# Altium PCB AD9834PCB.PcbDoc
Units mil, origin at the board's own origin, x right, y up, seen from the top; angles counter-clockwise.
Board outline 3031 x 3269 mil, 2 copper layers (Top Layer, Bottom Layer); 78 components, 30 nets, 256 pads, 392 vias.
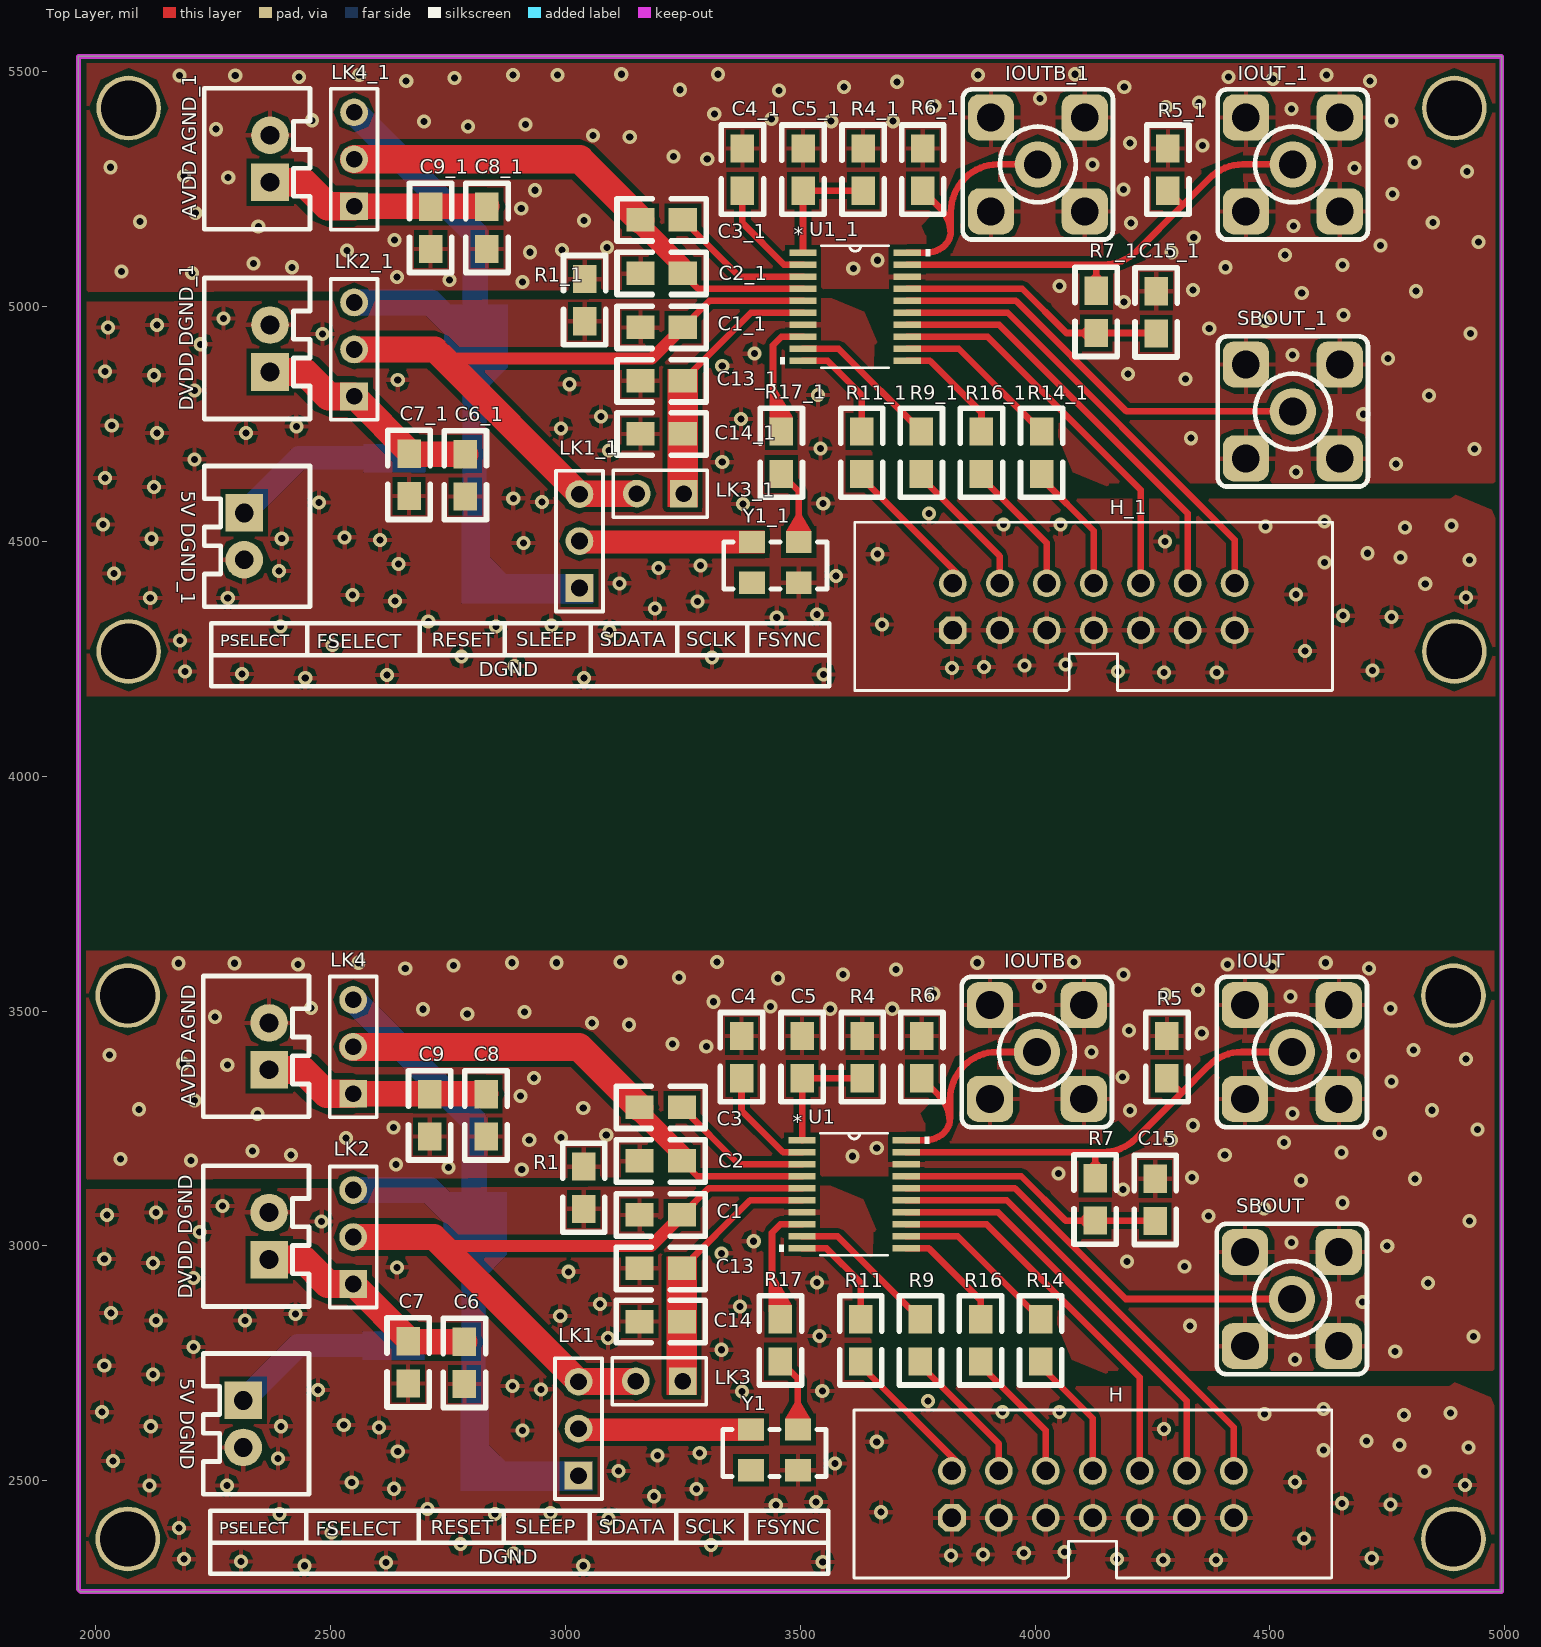
[diagram p0: Top Layer view]
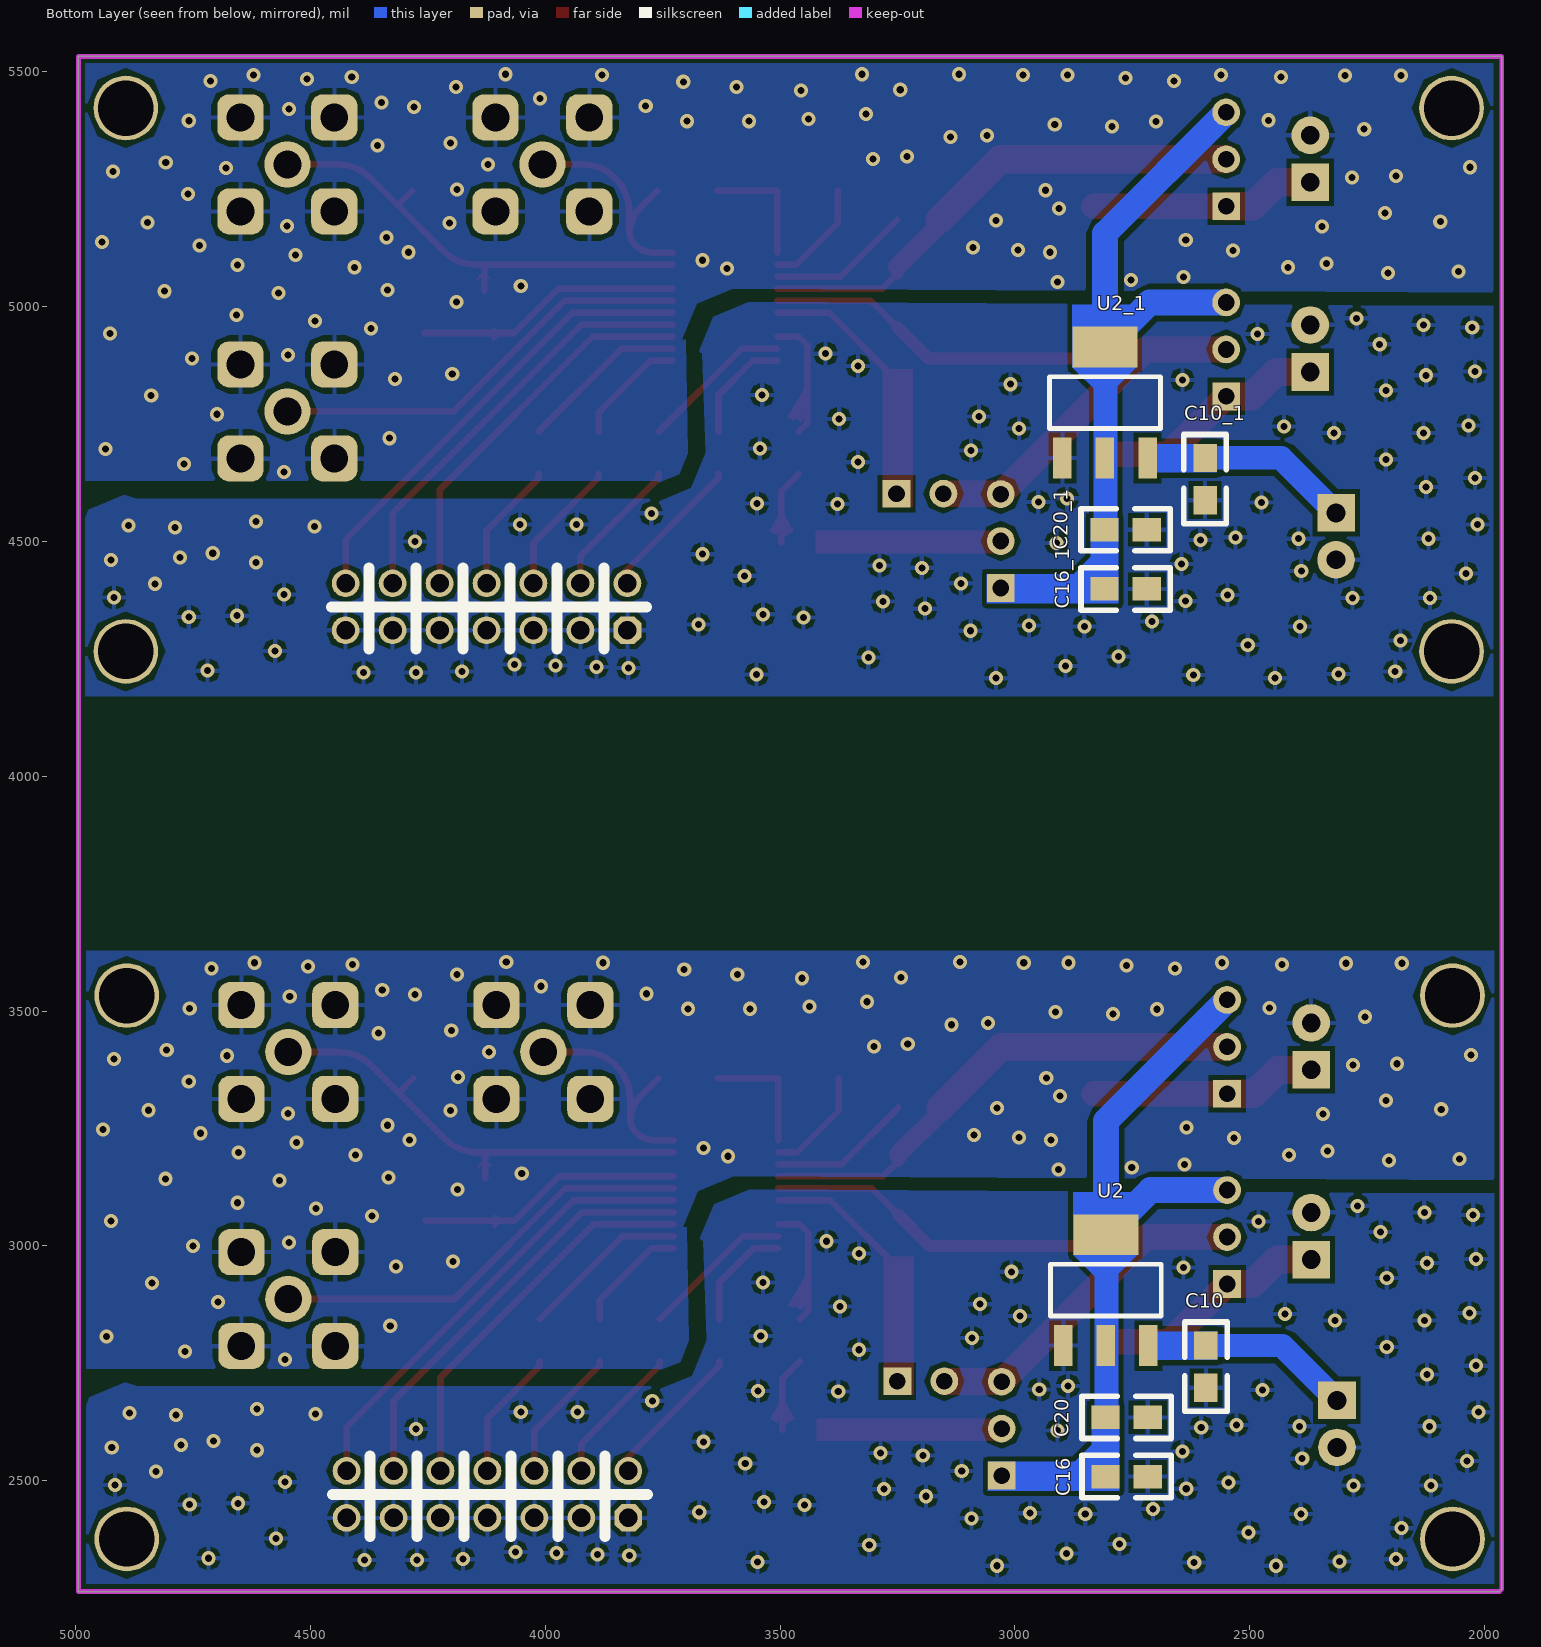
[diagram p1: Bottom Layer view, seen from below]

## Layer stack, top to bottom
Top Solder: solder mask 0.4, Solder Resist, Dk 3.5
Top Layer: signal copper 1.4
Dielectric 1: dielectric 12.6, FR-4, Dk 4.8
Bottom Layer: signal copper 1.4
Bottom Solder: solder mask 0.4, Solder Resist, Dk 3.5

## Board outline
1963,2269 1963,5533 4994,5533 4994,2264 1968,2264

## Design rules (kind name [scope] priority, off if disabled: settings)
Clearance [All] p1: gap=10
PolygonConnect [All] p1: connectstyle=Relief reliefconductorwidth=10 reliefentries=4 polygonreliefangle="90 Angle" airgapwidth=10
RoutingVias [All] p1: holewidth=28 width=50 viastyle="Through Hole" minholewidth=28 minwidth=50 maxholewidth=28 maxwidth=50
SolderMaskExpansion [All] p1: expansion=4
Width [All] p1: maxlimit=60 minlimit=6 preferedwidth=10
30 further rules are at their usual default settings.

## Classes and differential pairs
component class AD9834原理图: "5V DGND" "AVDD AGND" C1 C2 C3 C4 C5 C6 C7 C8 C9 C10 C13 C14 C15 C16 C20 "DVDD DGND" H IOUT IOUTB LK1 LK2 LK3 LK4 R1 R4 R5 R6 R7 R9 R11 R14 R16 R17 SBOUT U1 U2 Y1

## Components (designator, comment, footprint, x,y, rotation, side; value= is the part's Value field where it differs from the comment)
"5V DGND" "Power_2Port" Power_S_2Port 2314,2671 r270 top (schematic designator 5V)
"5V DGND_1" "Power_2Port" Power_S_2Port 2316,4561 r270 top (schematic designator 5V)
"AVDD AGND" "Power_2Port" Power_S_2Port 2369,3375 r90 top (schematic designator AVDD)
"AVDD AGND_1" "Power_2Port" Power_S_2Port 2371,5265 r90 top (schematic designator AVDD)
C1 "Cap1" 0805 3158,3066 r0 top
C1_1 "Cap1" 0805 3160,4956 r0 top (schematic designator C1)
C2 "Cap1" 0805 3158,3181 r0 top
C2_1 "Cap1" 0805 3160,5071 r0 top (schematic designator C2)
C3 "Cap1" 0805 3248,3295 r180 top
C3_1 "Cap1" 0805 3250,5185 r180 top (schematic designator C3)
C4 "Cap1" 0805 3375,3357 r90 top
C4_1 "Cap1" 0805 3377,5247 r90 top (schematic designator C4)
C5 "Cap1" 0805 3504,3447 r270 top
C5_1 "Cap1" 0805 3506,5337 r270 top (schematic designator C5)
C6 "Cap1" 0805 2785,2706 r90 top
C6_1 "Cap1" 0805 2787,4596 r90 top (schematic designator C6)
C7 "Cap1" 0805 2665,2707 r90 top
C7_1 "Cap1" 0805 2667,4597 r90 top (schematic designator C7)
C8 "Cap1" 0805 2831,3233 r90 top
C8_1 "Cap1" 0805 2833,5123 r90 top (schematic designator C8)
C9 "Cap1" 0805 2711,3233 r90 top
C9_1 "Cap1" 0805 2713,5123 r90 top (schematic designator C9)
C10 "Cap1" 0805 2593,2698 r90 bottom
C10_1 "Cap1" 0805 2595,4588 r90 bottom (schematic designator C10)
C13 "Cap1" 0805 3158,2952 r0 top
C13_1 "Cap1" 0805 3160,4842 r0 top (schematic designator C13)
C14 "Cap1" 0805 3158,2839 r0 top
C14_1 "Cap1" 0805 3160,4729 r0 top (schematic designator C14)
C15 "Cap1" 0805 4256,3143 r270 top
C15_1 "Cap1" 0805 4258,5033 r270 top (schematic designator C15)
C16 "Cap1" 0805 2717,2509 r0 bottom
C16_1 "Cap1" 0805 2719,4399 r0 bottom (schematic designator C16)
C20 "Cap1" 0805 2717,2635 r0 bottom
C20_1 "Cap1" 0805 2719,4525 r0 bottom (schematic designator C20)
"DVDD DGND" "Power_2Port" Power_S_2Port 2369,2971 r90 top (schematic designator DVDD)
"DVDD DGND_1" "Power_2Port" Power_S_2Port 2371,4861 r90 top (schematic designator DVDD)
H "Header 7X2" IDC-14 3823,2421 r0 top
H_1 "Header 7X2" IDC-14 3825,4311 r0 top (schematic designator H)
IOUT "SMA-2" SMA-KE 4547,3413 r90 top
IOUT_1 "SMA-2" SMA-KE 4549,5303 r90 top (schematic designator IOUT)
IOUTB "SMA-2" SMA-KE 4004,3413 r270 top
IOUTB_1 "SMA-2" SMA-KE 4006,5303 r270 top (schematic designator IOUTB)
LK1 "Header 3" HDR3X1_A 3028,2511 r90 top
LK1_1 "Header 3" HDR3X1_A 3030,4401 r90 top (schematic designator LK1)
LK2 "Header 3" HDR3X1_A 2548,2919 r90 top
LK2_1 "Header 3" HDR3X1_A 2550,4809 r90 top (schematic designator LK2)
LK3 "Header 2" HDR2X1_A 3250.06,2712 r180 top
LK3_1 "Header 2" HDR2X1_A 3252.06,4602 r180 top (schematic designator LK3)
LK4 "Header 3" HDR3X1_A 2548,3323.94 r90 top
LK4_1 "Header 3" HDR3X1_A 2550,5213.94 r90 top (schematic designator LK4)
R1 "RES" 0805 3039,3079 r90 top
R1_1 "RES" 0805 3041,4969 r90 top (schematic designator R1)
R4 "RES" 0805 3632,3447 r270 top
R4_1 "RES" 0805 3634,5337 r270 top (schematic designator R4)
R5 "RES" 0805 4281,3357 r90 top
R5_1 "RES" 0805 4283,5247 r90 top (schematic designator R5)
R6 "RES" 0805 3759,3447 r270 top
R6_1 "RES" 0805 3761,5337 r270 top (schematic designator R6)
R7 "RES" 0805 4128,3144 r270 top
R7_1 "RES" 0805 4130,5034 r270 top (schematic designator R7)
R9 "RES" 0805 3756,2754 r90 top
R9_1 "RES" 0805 3758,4644 r90 top (schematic designator R9)
R11 "RES" 0805 3629,2754 r90 top
R11_1 "RES" 0805 3631,4644 r90 top (schematic designator R11)
R14 "RES" 0805 4012,2754 r90 top
R14_1 "RES" 0805 4014,4644 r90 top (schematic designator R14)
R16 "RES" 0805 3884,2754 r90 top
R16_1 "RES" 0805 3886,4644 r90 top (schematic designator R16)
R17 "RES" 0805 3458,2754 r90 top
R17_1 "RES" 0805 3460,4644 r90 top (schematic designator R17)
SBOUT "SMA-2" SMA-KE 4547,2887 r0 top
SBOUT_1 "SMA-2" SMA-KE 4549,4777 r0 top (schematic designator SBOUT)
U1 "AD9834CRUZ" RU_20 3615,3110 r0 top
U1_1 "AD9834CRUZ" RU_20 3617,5000 r0 top (schematic designator U1)
U2 "AMS1117-3.3" SOT-223 2806,2906 r270 bottom
U2_1 "AMS1117-3.3" SOT-223 2808,4796 r270 bottom (schematic designator U2)
Y1 "75Mhz" SMDXTAL5032 3395,2609 r0 top
Y1_1 "75Mhz" SMDXTAL5032 3397,4499 r0 top (schematic designator Y1)

## Footprints (in the part's own frame and the unit in brackets; to place one, negate y for a bottom-side part, rotate by r counter-clockwise, add the part's x,y. Pads: shape width x height; smd on the part's side, far side on the other; paste and mask are expansions set on the pad)
0805 [mil]
  rect 60x50 smd: 1(0,0) 2(90,0)
  silkscreen extent -50,-45 140,45
HDR2X1_A [mm] "Connector; Header; 2 Position"
  rect 1.5x1.5 hole 0.9: 1(0,0)
  round 1.5 hole 0.9: 2(2.54,0)
  silkscreen extent -1.27,-1.27 3.81,1.27
HDR3X1_A [mm] "Connector; Header; 3 Position"
  rect 1.5x1.5 hole 0.9: 1(0,0)
  round 1.5 hole 0.9: 2(2.54,0) 3(5.08,0)
  silkscreen extent -1.27,-1.27 6.35,1.27
IDC-14 [mm]
  oct 1.5x1.5 hole 1: 1(0,0)
  round 1.5 hole 1: 2(0,2.54) 3(2.54,0) 4(2.54,2.54) 5(5.08,0) 6(5.08,2.54) 7(7.62,0) 8(7.62,2.54) 9(10.16,0) 10(10.16,2.54) 11(12.7,0) 12(12.7,2.54) 13(15.24,0) 14(15.24,2.54)
  silkscreen extent -5.3,-3.26 20.54,5.84, body extent -5.07,-2.98 20.31,5.87, height 9.13
Power_S_2Port [mil]
  rect 80x80 hole 40: 1(0,0)
  round 80 hole 40: 2(100,0)
  silkscreen extent -100,-85 200,140
RU_20 [mil]
  rect 58x14 smd mask+4: 1(-111,115.16) 2(-111,89.57) 3(-111,63.98) 4(-111,38.39) 5(-111,12.8) 6(-111,-12.8) 7(-111,-38.39) 8(-111,-63.98) 9(-111,-89.57) 10(-111,-115.16) 11(111,-115.16) 12(111,-89.57) 13(111,-63.98) 14(111,-38.39) 15(111,-12.8) 16(111,12.8) 17(111,38.39) 18(111,63.98) 19(111,89.57) 20(111,115.16)
  silkscreen extent -160,-130 160,130, body extent -126,-130 126,130, height 47
SMA-KE [mm]
  round 2.5 hole 1.5: 1(0,0)
  rrect50% 2.5x2.5 hole 1.5: 2(-2.54,2.54) 3(2.54,2.54) 4(-2.54,-2.54) 5(2.54,-2.54)
  silkscreen extent -4.06,-4.06 4.06,4.06, body extent -3.5,-3.5 3.5,3.5, height 9.53
SMDXTAL5032 [mm]
  rect 1.4x1.2 smd: 1(0,-2.2) 2(2.54,-2.2) 3(2.54,0) 4(0,0)
  silkscreen extent -1.52,-2.54 4.06,0
SOT-223 [mm]
  rect 2.2x1 smd: 1(3,-2.3) 2(3,0) 3(3,2.3)
  rect 2.2x3.5 smd: 4(-3,0)
  silkscreen extent -1.4,-3 1.4,3, body extent -3.49,-3.24 3.49,3.24, height 1.64

## Part data
H H_1: "Header, 7-Pin, Dual row"
LK1 LK1_1 LK2 LK2_1 LK3 LK3_1 LK4 LK4_1: "接插件"
U1 U1_1: "Imported"
U2 U2_1: library part AMS1117
Y1 Y1_1: library part XTAL4

## Free pads (board coordinates)
  round 137.8 hole 118.11: 0(4891,3533) 0(4893,5423) 1(4891,2376) 1(4893,4266) 2(2068,2376) 2(2070,4266) 3(2068,3533) 3(2070,5423)

## Via types
v1: diameter 30, hole 15, Top Layer to Bottom Layer, 392 vias

## Nets (pads, with @x,y where several pads share a name; then routed paths per layer and width w, separated by ;. In a path a pad name is that pad's centre, name@x,y a point inside that pad or via, vN(x,y) a via of type N, cw(c..) or ccw(c..) an arc to the next point about the centre after c; other vN are vias at no path point)
AGND: "AVDD AGND.2" C2.1 C4.2 C5.1 C8.1 C9.1 C15.1 IOUT.2 IOUT.3 IOUT.4 IOUT.5 IOUTB.2 IOUTB.3 IOUTB.4 IOUTB.5 R1.2 R4.1 R5.2 R6.1 SBOUT.2 SBOUT.3 SBOUT.4 SBOUT.5 U1.18
  other v1: 4554,2758 4767,2775 4934,2807 4330,2830 4697,2881 4837,2921 4318,2956 4196,2967 4750,3000 4546,3007 4925,3053 4369,3064 4488,3080 4655,3092 4187,3120 4566,3139 4809,3143 4334,3146 4050,3154 2907,3163 2751,3167 2639,3173 2203,3182 2053,3185 3611,3191 2416,3194 4404,3194 4653,3199 2334,3202 3663,3209 4530,3220 2923,3226 4289,3226 2533,3230 2991,3231 3087,3236 4734,3240 4942,3248 2634,3252 4336,3257 2344,3281 4548,3282 4202,3288 4845,3289 2092,3291 3038,3294 2210,3310 2904,3319 4759,3350 2933,3358 4186,3360 2280,3385 2186,3388 4918,3398 4678,3405 2029,3407 4120,3413 4806,3417 3300,3425 3228,3430 4355,3453 4200,3459 3135,3471 3057,3475 2254,3488 2791,3494 2913,3498 2697,3504 3564,3505 3696,3505 4757,3506 2458,3507 3437,3510 3315,3520 4544,3531 4277,3535 3784,3537 4347,3545 4009,3553 3453,3570 3242,3572 3591,3578 4188,3578 3704,3589 2659,3591 4711,3591 4505,3595 2762,3597 2431,3599 4410,3599 2176,3602 2295,3602 2559,3603 2886,3603 2981,3603 3877,3603 4619,3603 3117,3605 3323,3605 4083,3605
AVDD: C2.2 C3.2 LK4.2 U1.4 | length 1084.2
  Top Layer w14: C2.2 3280.61,3148.39 U1.4
  Top Layer w26: C3.2@3158,3285 C3.2 ; C2.2 C2.2@3248,3195
  Top Layer w40: C3.2@3158,3285 C2.2@3248,3195
  Top Layer w60: LK4.2 3029.06,3423.94 C3.2
AVDD-OUT: "AVDD AGND.1" C8.2 C9.2 LK4.1 | length 482.2
  Top Layer w55: LK4.1 C8.2@2830.06,3323.94
  Top Layer w60: 2369,3375 2440,3375 2491.06,3323.94 LK4.1
CAP/2.5V: C13.2 C14.2 LK3.1 U1.6 | length 557
  Top Layer w14: LK3.1 3248,2714.06 C14.2 C13.2 3393.2,3097.2 U1.6
DGND: "5V DGND.2" "DVDD DGND.2" C1.1 C6.1 C7.1 C10.1 C13.1 C14.1 C16.1 C20.1 H.1 H.3 H.5 H.7 H.9 H.11 H.13 R1.1 U1.7 U2.1 Y1.2
  other v1: 2444,2319 3038,2319 2618,2326 3548,2327 2309,2328 4273,2331 4385,2331 2188,2333 4175,2333 4717,2335 3821,2341 3889,2343 2890,2345 3976,2346 4063,2348 3310,2363 2777,2365 4573,2377 2502,2390 2177,2399 3092,2420 2391,2429 2850,2429 2968,2431 3672,2433 2706,2440 3448,2448 4757,2449 4654,2452 3534,2455 3189,2467 3279,2482 2635,2483 2114,2490 2279,2490 4916,2491 2545,2496 4554,2497 4829,2520 3113,2521 3574,2537 2037,2542 2388,2547 3196,2554 3286,2559 2643,2562 4614,2565 4923,2571 4776,2576 3663,2583 4706,2585 2909,2607 4275,2610 2603,2613 2117,2616 2394,2616 2528,2619 4786,2640 4489,2642 4885,2644 2013,2646 3931,2646 4052,2646 4614,2653 3772,2670 3376,2690 3547,2691 2473,2693 2948,2694 2887,2702 2122,2726 2018,2745 3332,2779 2208,2785 3091,2804 3541,2808 2128,2841 2318,2841 2989,2851 2425,2855 2032,2857 3372,2871 3074,2876 3536,2922 2208,2932 3007,2945 2641,2954 2122,2964 2018,2972 3332,2984 3401,3010 2221,3030 2481,3052 2024,3066 2128,3071 2270,3085
DVDD: C1.2 LK1.3 LK2.2 LK3.2 U1.5 | length 1423.4
  Top Layer w14: C1.2 3304.8,3122.8 U1.5
  Top Layer w26: 2739,3000 3182,3000 C1.2
  Top Layer w55: LK2.2 2720,3019 2739,3000 LK1.3
DVDD-OUT: "DVDD DGND.1" C6.2 C7.2 LK2.1 | length 488.5
  Top Layer w55: LK2.1 2671,2796 C6.2
  Top Layer w60: 2369,2971 2442,2971 2494,2919 LK2.1
FSELECT: R9.2 U1.9 | length 325.1
  Top Layer w14: U1.9 3579.57,3020.43 R9.2
FSYNC: H.14 U1.15 | length 990.1
  Top Layer w14: U1.15 3939.8,3097.2 4423,2614 H.14
IOUT: IOUT.1 R5.1 R7.1 U1.19 | length 1000.2
  Top Layer w14: U1.19 4128,3199.57 ; R7.1 4128,3199.57 ; R5.1 4312,3326 ; IOUT.1 4440.42,3413 ccw(c4440.42,3313) 4369.71,3383.71 4312,3326 ; 4128,3199.57 4144.15,3199.57 ccw(c4144.15,3299.57) 4214.86,3228.86 4312,3326
MCLK: R17.2 U1.8 | length 262.9
  Top Layer w14: R17.2 3440,2862 3440,3028 3458.02,3046.02 U1.8
Net5V_1: "5V DGND.1" C10.2 U2.3 | length 327.5
  Bottom Layer w50: 2314,2671 2431,2788 C10.2
NetC3_1: C3.1 U1.3 | length 306.1
  Top Layer w14: C3.1 3369.02,3173.98 U1.3
NetC4_1: C4.1 U1.2 | length 234.6
  Top Layer w14: C4.1 3375,3288 3463.43,3199.57 U1.2
NetC5_2: C5.2 R4.2 U1.1 | length 259.8
  Top Layer w14: U1.1 C5.2 R4.2
NetC15_2: C15.2 R7.2 U1.17 | length 568.1
  Top Layer w14: U1.17 3970.61,3148.39 4065,3054 R7.2 C15.2@4255,3054
NetH_2: H.2 R11.1 | length 325
  Top Layer w14: R11.1 3629,2745 3837,2537 3837,2535 H.2
NetH_4: H.4 R9.1 | length 302.2
  Top Layer w14: R9.1 3756,2746 3923,2579 H.4
NetH_6: H.6 R16.1 | length 290.6
  Top Layer w14: R16.1 3884,2746 4023,2607 H.6
NetH_8: H.8 R14.1 | length 279
  Top Layer w14: R14.1 4012,2744 4123,2633 H.8
NetIOUTB_1: IOUTB.1 R6.2 U1.20 | length 507.9
  Top Layer w14: U1.20 3767.05,3225.16 ccw(c3767.05,3280.95) 3806.5,3241.5 ccw(c3776.32,3271.68) 3818.38,3264.42 ccw(c3738.21,3264.42) 3794.9,3321.1 R6.2 ; 3819,3271.68 3819,3311.57 cw(c3921.43,3311.57) 3849,3384 cw(c3919.01,3313.99) 3919.01,3413 IOUTB.1
NetLK1_2: LK1.2 Y1.4
NetR17_1: R17.1 Y1.3 | length 160.3
  Top Layer w14: R17.1 3495,2717 Y1.3
NetSBOUT_1: SBOUT.1 U1.16 | length 918.7
  Top Layer w14: U1.16 3957.2,3122.8 4193,2887 SBOUT.1
PSELECT: R11.2 U1.10 | length 233.2
  Top Layer w14: U1.10 3556.16,2994.84 3629,2922 R11.2
RESET: R16.2 U1.11 | length 244.5
  Top Layer w14: U1.11 3774.16,2994.84 3884,2885 R16.2
SCLK: H.12 U1.14 | length 912.4
  Top Layer w14: U1.14 3921.39,3071.61 4323,2670 H.12
SDATA: H.10 U1.13 | length 831
  Top Layer w14: U1.13 3896.98,3046.02 4223,2720 H.10
SLEEP: R14.2 U1.12 | length 359.1
  Top Layer w14: U1.12 3835.57,3020.43 R14.2
VCC3.3V: C16.2 C20.2 LK1.1 LK2.3 LK4.3 U2.2 U2.4 | length 904
  Bottom Layer w55: LK2.3 2711.11,3119 U2.4 2806,3265.94 LK4.3
pads on no net: "5V DGND_1.1" "5V DGND_1.2" "AVDD AGND_1.1" "AVDD AGND_1.2" "DVDD DGND_1.1" "DVDD DGND_1.2" C1_1.1 C1_1.2 C2_1.1 C2_1.2 C3_1.1 C3_1.2 C4_1.1 C4_1.2 C5_1.1 C5_1.2 C6_1.1 C6_1.2 C7_1.1 C7_1.2 C8_1.1 C8_1.2 C9_1.1 C9_1.2 C10_1.1 C10_1.2 C13_1.1 C13_1.2 C14_1.1 C14_1.2 C15_1.1 C15_1.2 C16_1.1 C16_1.2 C20_1.1 C20_1.2 H_1.1 H_1.2 H_1.3 H_1.4 H_1.5 H_1.6 H_1.7 H_1.8 H_1.9 H_1.10 H_1.11 H_1.12 H_1.13 H_1.14 IOUT_1.1 IOUT_1.2 IOUT_1.3 IOUT_1.4 IOUT_1.5 IOUTB_1.1 IOUTB_1.2 IOUTB_1.3 IOUTB_1.4 IOUTB_1.5 LK1_1.1 LK1_1.2 LK1_1.3 LK2_1.1 LK2_1.2 LK2_1.3 LK3_1.1 LK3_1.2 LK4_1.1 LK4_1.2 LK4_1.3 R1_1.1 R1_1.2 R4_1.1 R4_1.2 R5_1.1 R5_1.2 R6_1.1 R6_1.2 R7_1.1 R7_1.2 R9_1.1 R9_1.2 R11_1.1 R11_1.2 R14_1.1 R14_1.2 R16_1.1 R16_1.2 R17_1.1 R17_1.2 SBOUT_1.1 SBOUT_1.2 SBOUT_1.3 SBOUT_1.4 SBOUT_1.5 U1_1.1 U1_1.2 U1_1.3 U1_1.4 U1_1.5 U1_1.6 U1_1.7 U1_1.8 U1_1.9 U1_1.10 U1_1.11 U1_1.12 U1_1.13 U1_1.14 U1_1.15 U1_1.16 U1_1.17 U1_1.18 U1_1.19 U1_1.20 U2_1.1 U2_1.2 U2_1.3 U2_1.4 Y1.1 Y1_1.1 Y1_1.2 Y1_1.3 Y1_1.4
copper on no net: | length 14577.6
  Top Layer w14: 3250,4956 3306.8,5012.8 3506,5012.8 ; 3250,5071 3282.61,5038.39 3506,5038.39 ; 3250,5185 3371.02,5063.98 3506,5063.98 ; 3252.06,4602 3250,4604.06 3250,4729 3250,4842 3395.2,4987.2 3506,4987.2 ; 3377,5247 3377,5178 3465.43,5089.57 3506,5089.57 ; 3460,4644 3497,4607 3497,4499 ; 3460,4734 3442,4752 3442,4918 3460.02,4936.02 3506,4936.02 ; 3506,4884.84 3558.16,4884.84 3631,4812 3631,4734 ; 3506,4910.43 3581.57,4910.43 3758,4734 ; 3506,5115.16 3506,5247 3634,5247 ; 3631,4644 3631,4635 3839,4427 3839,4425 3825,4411 ; 3728,4884.84 3776.16,4884.84 3886,4775 3886,4734 ; 3728,4910.43 3837.57,4910.43 4014,4734 ; 3728,4936.02 3898.98,4936.02 4225,4610 4225,4411 ; 3728,4961.61 3923.39,4961.61 4325,4560 4325,4411 ; 3728,4987.2 3941.8,4987.2 4425,4504 4425,4411 ; 3728,5012.8 3959.2,5012.8 4195,4777 4549,4777 ; 3728,5038.39 3972.61,5038.39 4067,4944 4130,4944 4257,4944 ; 3728,5089.57 4130,5089.57 ; 3728,5115.16 3769.05,5115.16 ccw(c3769.05,5170.95) 3808.5,5131.5 ccw(c3778.32,5161.68) 3820.38,5154.42 ccw(c3740.21,5154.42) 3796.9,5211.1 3761,5247 ; 3758,4644 3758,4636 3925,4469 3925,4411 ; 3821,5161.68 3821,5201.57 cw(c3923.43,5201.57) 3851,5274 cw(c3921.01,5203.99) 3921.01,5303 4006,5303 ; 3886,4644 3886,4636 4025,4497 4025,4411 ; 4014,4644 4014,4634 4125,4523 4125,4411 ; 4130,5034 4130,5089.57 ; 4283,5247 4314,5216 ; 4549,5303 4442.42,5303 ccw(c4442.42,5203) 4371.71,5273.71 4314,5216 ; 4130,5089.57 4146.15,5089.57 ccw(c4146.15,5189.57) 4216.86,5118.86 4314,5216
  Top Layer w26: 2741,4890 3184,4890 3250,4956 ; 3160,5175 3160,5185 ; 3250,5071 3250,5085
  Top Layer w40: 3160,5175 3250,5085
  Top Layer w55: 2550,4809 2673,4686 2787,4686 ; 2550,4909 2722,4909 2741,4890 3030,4601 ; 2550,5213.94 2832.06,5213.94
  Top Layer w60: 2371,4861 2444,4861 2496,4809 2550,4809 ; 2371,5265 2442,5265 2493.06,5213.94 2550,5213.94 ; 2550,5313.94 3031.06,5313.94 3160,5185
  Bottom Layer w50: 2316,4561 2433,4678 2595,4678
  Bottom Layer w55: 2550,5009 2713.11,5009 2808,4914.11 2808,5155.94 2550,5413.94
  other v1: 2446,4209 3040,4209 2620,4216 3550,4217 2311,4218 4275,4221 4387,4221 2190,4223 4177,4223 4719,4225 3823,4231 3891,4233 2892,4235 3978,4236 4065,4238 3312,4253 2779,4255 4575,4267 2504,4280 2179,4289 3094,4310 2393,4319 2852,4319 2970,4321 3674,4323 2708,4330 3450,4338 4759,4339 4656,4342 3536,4345 3191,4357 3281,4372 2637,4373 2116,4380 2281,4380 4918,4381 2547,4386 4556,4387 4831,4410 3115,4411 3576,4427 2039,4432 2390,4437 3198,4444 3288,4449 2645,4452 4616,4455 4925,4461 4778,4466 3665,4473 4708,4475 2911,4497 4277,4500 2605,4503 2119,4506 2396,4506 2530,4509 4788,4530 4491,4532 4887,4534 2015,4536 3933,4536 4054,4536 4616,4543 3774,4560 3378,4580 3549,4581 2475,4583 2950,4584 2889,4592 2124,4616 2020,4635 4556,4648 4769,4665 3334,4669 2210,4675 3093,4694 4936,4697 3543,4698 4332,4720 2130,4731 2320,4731 2991,4741 2427,4745 2034,4747 3374,4761 3076,4766 4699,4771 4839,4811 3538,4812 2210,4822 3009,4835 2643,4844 4320,4846 2124,4854 4198,4857 2020,4862 3334,4874 4752,4890 4548,4897 3403,4900 2223,4920 2483,4942 4927,4943 4371,4954 2026,4956 2130,4961 4490,4970 2272,4975 4657,4982 4189,5010 4568,5029 4811,5033 4336,5036 4052,5044 2909,5053 2753,5057 2641,5063 2205,5072 2055,5075 3613,5081 2418,5084 4406,5084 4655,5089 2336,5092 3665,5099 4532,5110 2925,5116 4291,5116 2535,5120 2993,5121 3089,5126 4736,5130 4944,5138 2636,5142 4338,5147 2346,5171 4550,5172 4204,5178 4847,5179 2094,5181 3040,5184 2212,5200 2906,5209 4761,5240 2935,5248 4188,5250 2282,5275 2188,5278 4920,5288 4680,5295 2031,5297 4122,5303 4808,5307 3302,5315 3230,5320 4357,5343 4202,5349 3137,5361 3059,5365 2256,5378 2793,5384 2915,5388 2699,5394 3566,5395 3698,5395 4759,5396 2460,5397 3439,5400 3317,5410 4546,5421 4279,5425 3786,5427 4349,5435 4011,5443 3455,5460 3244,5462 3593,5468 4190,5468 3706,5479 2661,5481 4713,5481 4507,5485 2764,5487 2433,5489 4412,5489 2178,5492 2297,5492 2561,5493 2888,5493 2983,5493 3879,5493 4621,5493 3119,5495 3325,5495 4085,5495

## Polygon pours and split planes (outlines as drawn)
no net on Bottom Layer "Top Layer-No Net" (solid, pour order 32): 1965,5030 3601,5030 cw(c3601,4930) 3701,4930 3701,4688 ccw(c3760,4688) 3760,4629 4996,4629 4996,5535 cw(c4993.5,5535) 4993.5,5532.5 1967.5,5532.5
no net on Bottom Layer "Top Layer-No Net" (solid, pour order 30): 1965,5002 3566,5002 cw(c3566,4902) 3666,4902 3666,4689 ccw(c3764,4689) 3764,4591 4870,4591 4896,4591 cw(c4896,4491) 4996,4491 4996,4154 ccw(c4993.5,4154) 4993.5,4156.5 1967.5,4156.5 cw(c1967.5,4159) 1965,4159
DGND on Bottom Layer "Top Layer-No Net" (solid, pour order 14): 1963,3112 3564,3112 cw(c3564,3012) 3664,3012 3664,2799 ccw(c3762,2799) 3762,2701 4868,2701 4894,2701 cw(c4894,2601) 4994,2601 4994,2264 ccw(c4991.5,2264) 4991.5,2266.5 1965.5,2266.5 cw(c1965.5,2269) 1963,2269
AGND on Bottom Layer "Top Layer-No Net" (solid, pour order 20): 1963,3140 3599,3140 cw(c3599,3040) 3699,3040 3699,2798 ccw(c3758,2798) 3758,2739 4994,2739 4994,3645 cw(c4991.5,3645) 4991.5,3642.5 1965.5,3642.5
no net on Top Layer "Top Layer-No Net" (solid, pour order 36): 1962,5031 3957,5031 cw(c3957,4931) 4057,4931 4057,4895 4057,4724 ccw(c4157,4724) 4157,4624 4995,4624 ccw(c4995,4625) 4996,4625 4996,5535 cw(c4993.5,5535) 4993.5,5532.5 1967.5,5532.5
no net on Top Layer "Top Layer-No Net" (solid, pour order 34): 1965,5001 cw(c1975,5001) 1975,5011 3567,5011 cw(c3567,4920) 3658,4920 3658,4654 ccw(c3721,4654) 3721,4591 4884,4591 4896,4591 cw(c4896,4491) 4996,4491 4996,4154 ccw(c4993.5,4154) 4993.5,4156.5 1967.5,4156.5
DGND on Top Layer "Top Layer-No Net" (solid, pour order 16): 1963,3111 cw(c1973,3111) 1973,3121 3565,3121 cw(c3565,3030) 3656,3030 3656,2764 ccw(c3719,2764) 3719,2701 4882,2701 4894,2701 cw(c4894,2601) 4994,2601 4994,2264 ccw(c4991.5,2264) 4991.5,2266.5 1965.5,2266.5
AGND on Top Layer "Top Layer-No Net" (solid, pour order 18): 1960,3141 3955,3141 cw(c3955,3041) 4055,3041 4055,3005 4055,2834 ccw(c4155,2834) 4155,2734 4993,2734 ccw(c4993,2735) 4994,2735 4994,3645 cw(c4991.5,3645) 4991.5,3642.5 1965.5,3642.5

## Keep-outs
Keep-Out Layer:
  the board outline again, w10

## Other copper
Top Layer:
  rectangle: 3217,4573 3282,4867
  region: 4117.5,5056.5 4130,5069 4126.5,5072.5 4114,5060
  region: 4144,5055 4148,5059 4134,5073 4130,5069
  region: 4130.5,5073.5 4145.78,5088.78 4142.78,5091.78 4127.5,5076.5
  region: 4127.5,5076.5 4133,5082 4119.5,5095.5 4114,5090
  region: 4110,4926 4117,4933 4103,4947 4096,4940
  region: 4099,4940 4112,4953 4107,4958 4094,4945
  rectangle: 3021,4475 3424,4523
  rectangle: 3028,4573 3152,4630
  region: 3508.26,4512.91 3524,4522 3503.74,4557.09 3488,4548
  region: 3489.29,4510.86 3509.45,4545.77 3490,4557 3469.84,4522.09
  region: 3472.07,4756.53 3485,4764 3448.93,4826.47 3436,4819
  region: 3460.92,4756.03 3473,4763 3451.08,4800.97 3439,4794
  region: 3454.2,4752.14 3460.92,4756.03 3447.73,4778.88 3441,4775
  region net MCLK: 3452.2,2862.14 3458.92,2866.03 3445.73,2888.88 3439,2885
  region net MCLK: 3458.92,2866.03 3471,2873 3449.08,2910.97 3437,2904
  region net MCLK: 3470.07,2866.53 3483,2874 3446.93,2936.47 3434,2929
  region net NetR17_1: 3487.29,2620.86 3507.45,2655.77 3488,2667 3467.84,2632.09
  region net NetR17_1: 3506.26,2622.91 3522,2632 3501.74,2667.09 3486,2658
  rectangle net DVDD: 3026,2683 3150,2740
  rectangle net NetLK1_2: 3019,2585 3422,2633
  region net NetC15_2: 4097,3050 4110,3063 4105,3068 4092,3055
  region net NetC15_2: 4108,3036 4115,3043 4101,3057 4094,3050
  region net IOUT: 4125.5,3186.5 4131,3192 4117.5,3205.5 4112,3200
  region net IOUT: 4128.5,3183.5 4143.78,3198.78 4140.78,3201.78 4125.5,3186.5
  region net IOUT: 4142,3165 4146,3169 4132,3183 4128,3179
  region net IOUT: 4115.5,3166.5 4128,3179 4124.5,3182.5 4112,3170
  rectangle net CAP/2.5V: 3215,2683 3280,2977
Bottom Layer:
  region: 2861,4393 2887,4419 2837,4469 2811,4443
  region: 2821.5,4814.5 2878,4871 2848.5,4900.5 2792,4844
  region: 2788.5,4823.5 2820,4855 2771.5,4903.5 2740,4872
  rectangle: 2742,4871 2878,5005
  rectangle: 2781,4634 2832,4883
  rectangle: 2781,4527 2832,4634
  rectangle: 2779,4387 2839,4550
  rectangle: 2779,4368 3060,4431
  rectangle: 2570,4647 2702,4708
  rectangle net Net5V_1: 2568,2757 2700,2818
  rectangle net VCC3.3V: 2777,2478 3058,2541
  rectangle net VCC3.3V: 2777,2497 2837,2660
  rectangle net VCC3.3V: 2779,2637 2830,2744
  rectangle net VCC3.3V: 2779,2744 2830,2993
  rectangle net VCC3.3V: 2740,2981 2876,3115
  region net VCC3.3V: 2786.5,2933.5 2818,2965 2769.5,3013.5 2738,2982
  region net VCC3.3V: 2819.5,2924.5 2876,2981 2846.5,3010.5 2790,2954
  region net VCC3.3V: 2859,2503 2885,2529 2835,2579 2809,2553

## Silkscreen, mask and mechanical layers (free items; w line width, h text height)
Top Overlay:
  lines w10: 2244,2368 3559,2368 ; 2246,4258 3561,4258 ; 2448,2370 2448,2436 ; 2450,4260 2450,4326 ; 2688,2369 2688,2436 ; 2690,4259 2690,4326 ; 2869,2369 2869,2436 ; 2871,4259 2871,4326 ; 3052,2368 3052,2436 ; 3054,4258 3054,4326 ; 3236,2369 3236,2436 ; 3238,4259 3238,4326 ; 3385,2370 3385,2436 ; 3387,4260 3387,4326 ; 2244,2302 3560,2302 3560,2436 2244,2436 2244,2302 ; 2246,4192 2246,4326 3562,4326 3562,4192 2246,4192
  text "PSELECT" at 2265,4277 h25
  text "SLEEP" at 2895,4277 h30
  text "SDATA" at 3073,4277 h30
  text "SCLK" at 3257,4277 h30
  text "RESET" at 2715,4276 h30
  text "FSYNC" at 3408,4276 h30
  text "FSELECT" at 2470,4273 h30
  text "DGND" at 2816,4213 h30
  text "PSELECT" at 2263,2387 h25
  text "SLEEP" at 2893,2387 h30
  text "SDATA" at 3071,2387 h30
  text "SCLK" at 3255,2387 h30
  text "RESET" at 2713,2386 h30
  text "FSYNC" at 3406,2386 h30
  text "FSELECT" at 2468,2383 h30
  text "DGND" at 2814,2323 h30

## Text inside footprints (layer, text, board x,y; h text height)
U1: Top Overlay "*" at 3484,3249.16 h30; Mechanical 13 "*" at 3484,3249.16 h30
U1_1: Top Overlay "*" at 3486,5139.16 h30; Mechanical 13 "*" at 3486,5139.16 h30